# Altium PCB BatteryOperatedNode_V01.PcbDoc
Units mm, origin at the board's own origin, x right, y up, seen from the top; angles counter-clockwise.
Board outline 41.22 x 57.73 mm, 2 copper layers (Top, Bottom), stack 1.57 mm thick; 73 components, 60 nets, 243 pads, 137 vias.
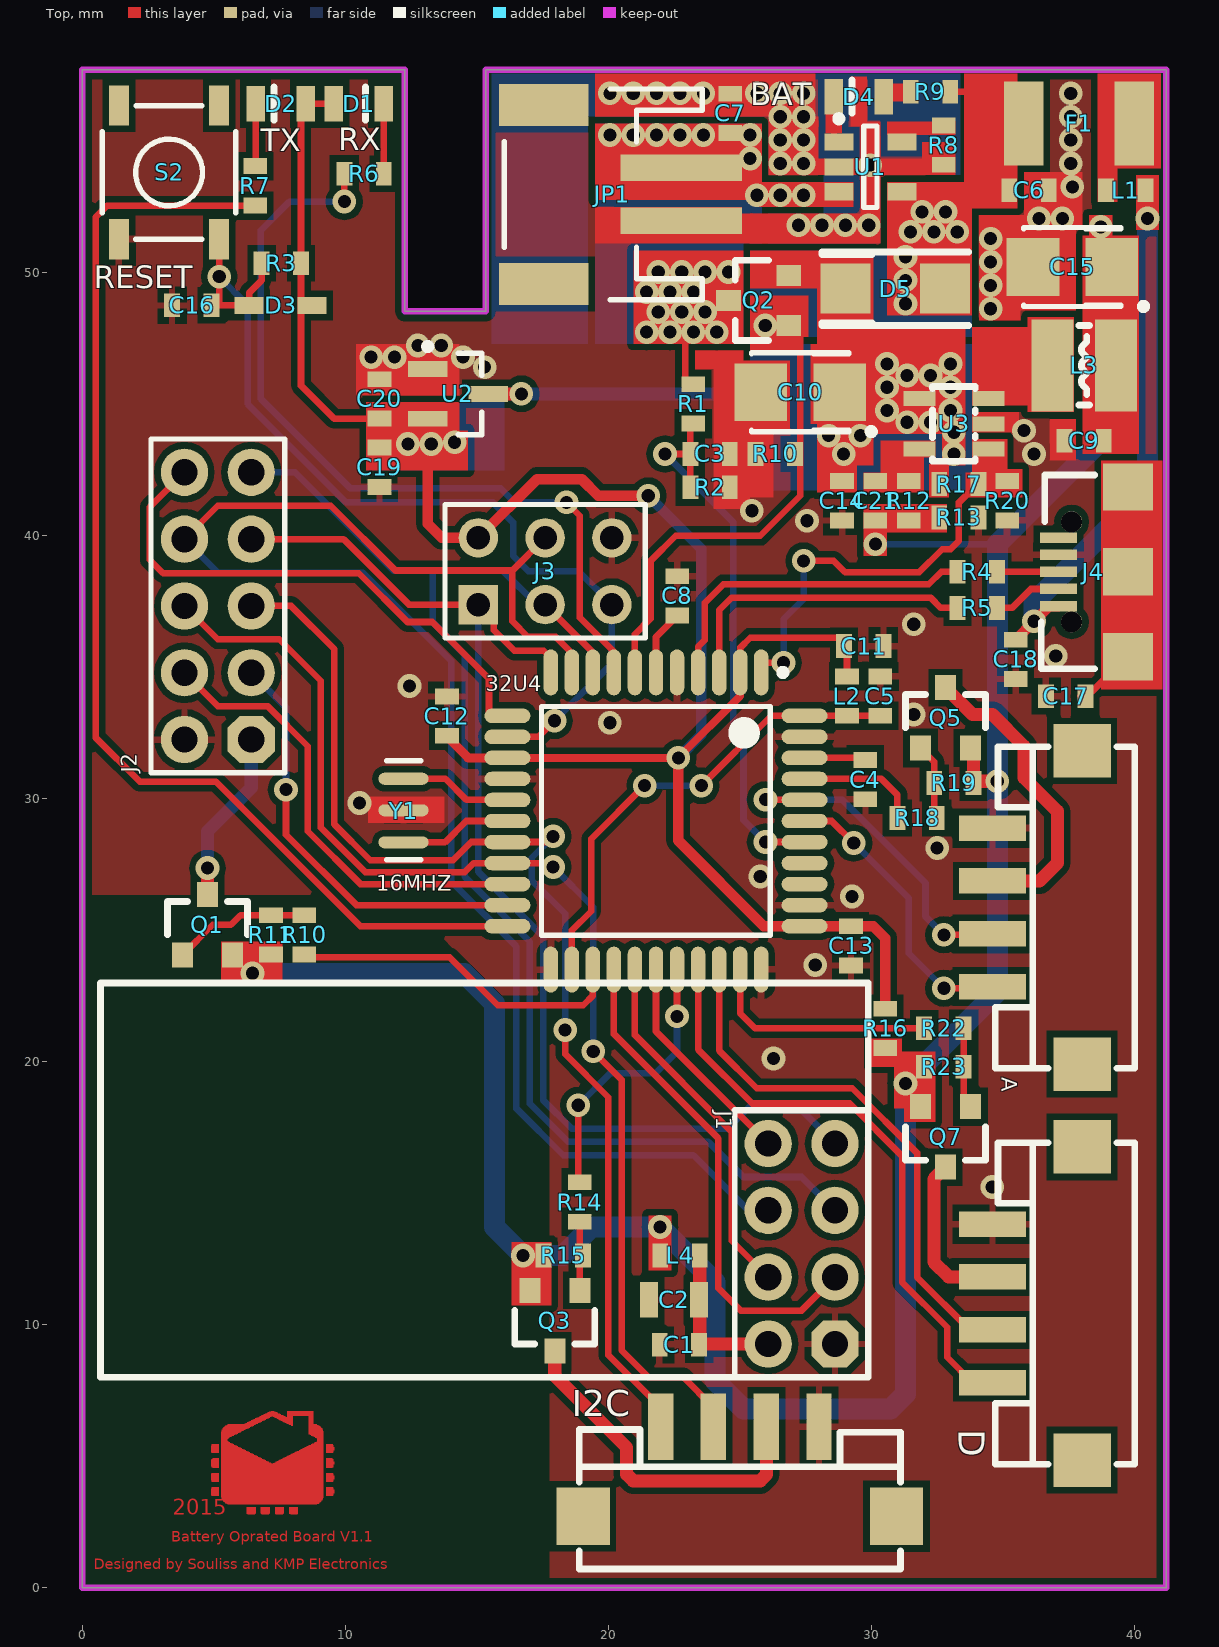
[diagram p0: Top view]
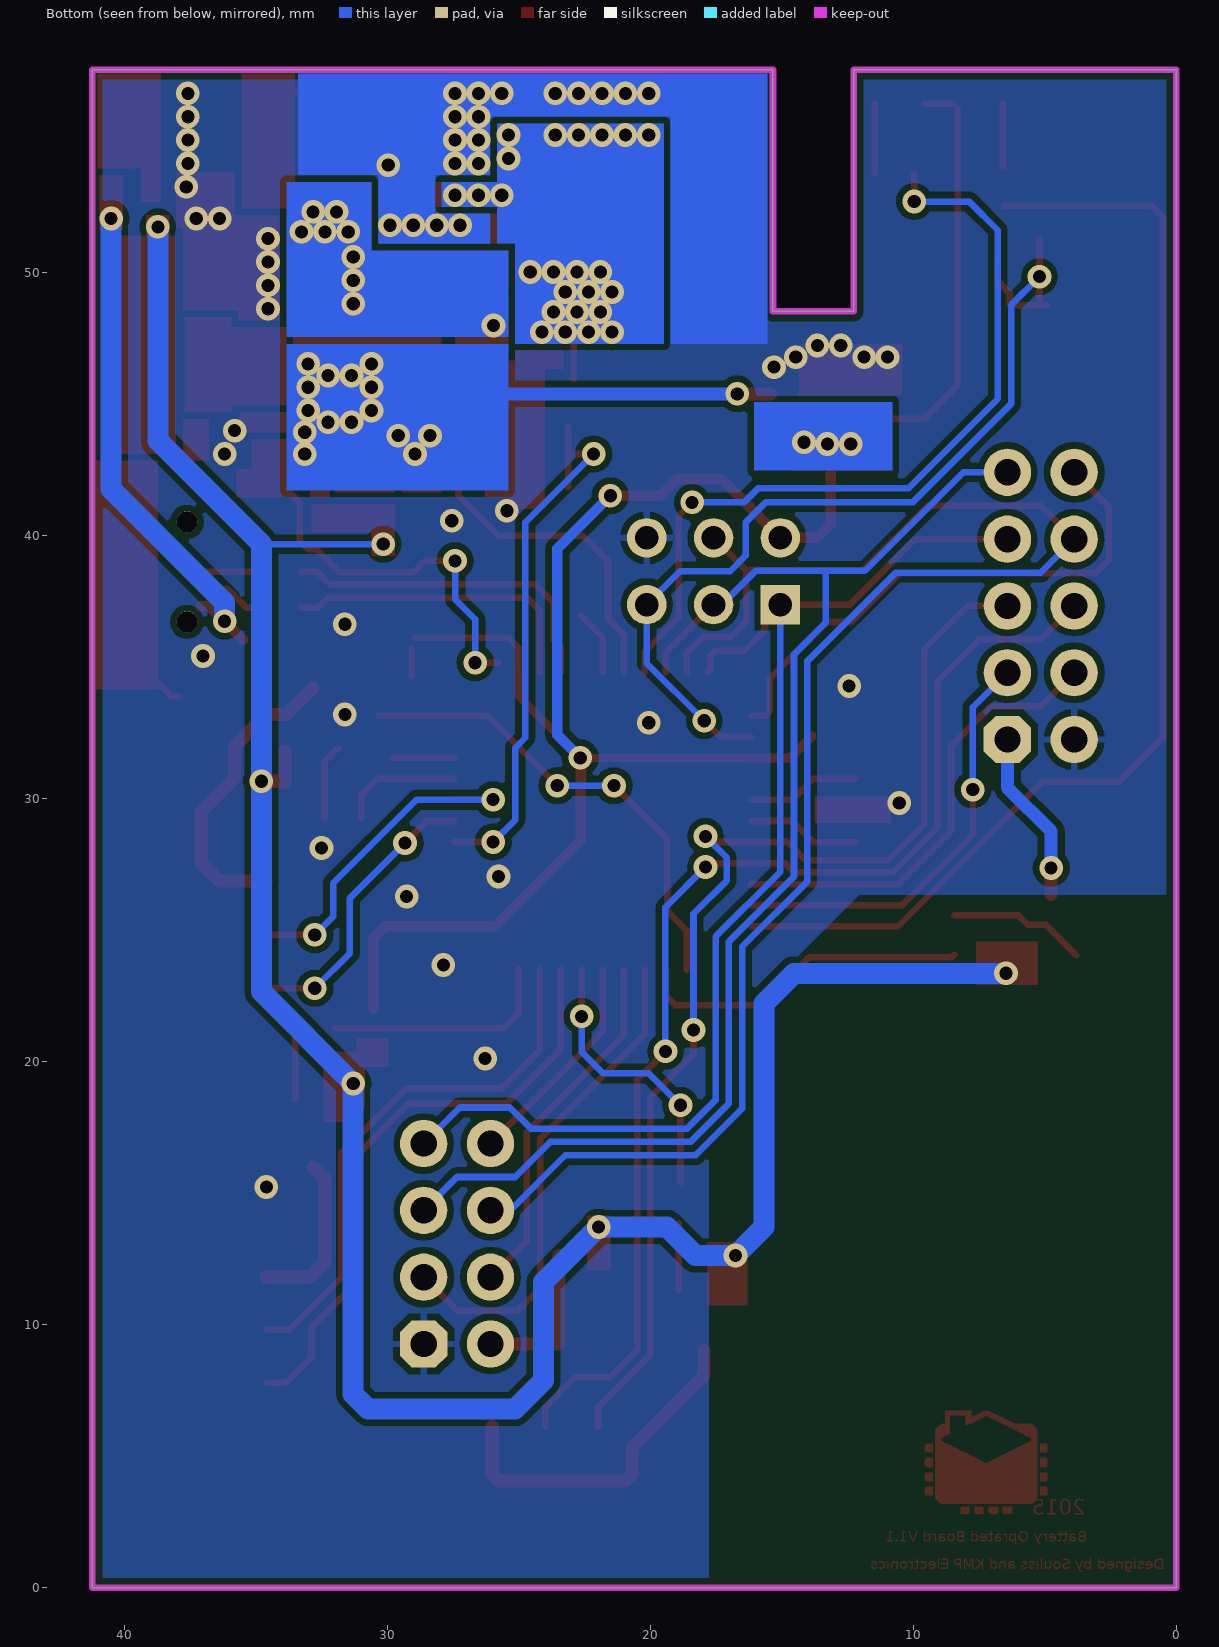
[diagram p1: Bottom view, seen from below]
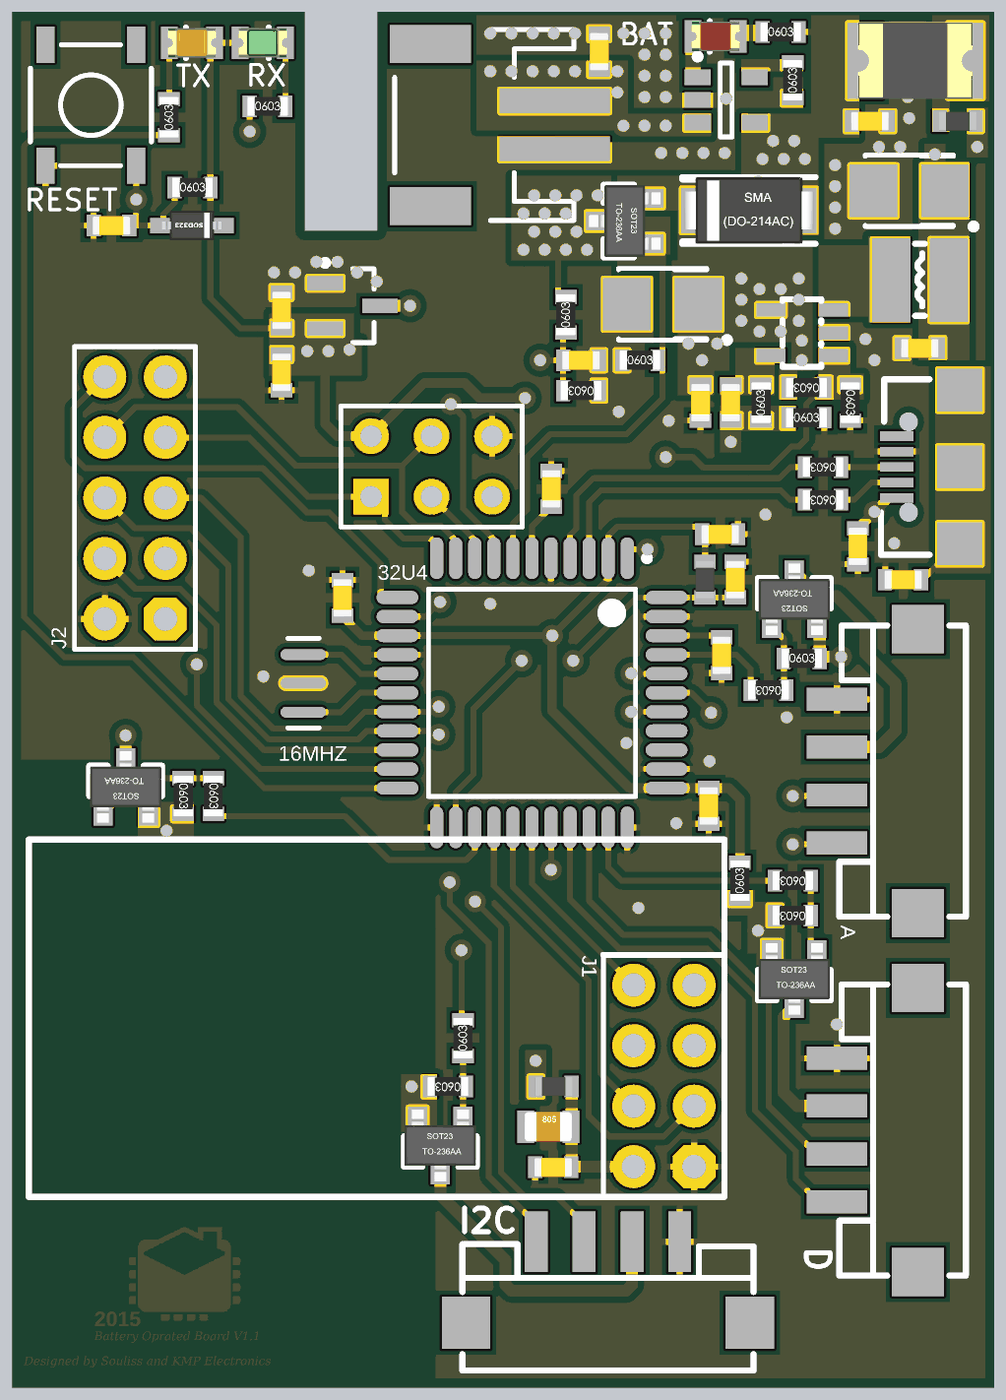
[diagram p2: 3D render of the assembled board from above, using the file's embedded part models]

## Layer stack, top to bottom
Top Solder: solder mask 0.0102, Solder Resist, Dk 3.5
Top: signal copper 0.035
Dielectric 1: core 1.5, FR-4, Dk 4.8
Bottom: signal copper 0.035
Bottom Solder: solder mask 0.0102, Solder Resist, Dk 3.5

## Board outline
0,0 0,57.734 12.268,57.734 12.268,48.539 15.342,48.539 15.342,57.734 41.224,57.734 41.224,0

## Design rules (kind name [scope] priority, off if disabled: settings)
Clearance POLY [InPolygon] p1: gap=0.25
Clearance mdViaVia [IsVia vs IsVia] p2: gap=0.203
Clearance mdPadVia [IsPad vs IsVia] p3: gap=0.203
Clearance mdPadPad [IsPad vs IsPad] p4: gap=0.203
Clearance mdWireVia [(InLayerClass('Signal Layers') AND IsTrack) vs IsVia] p5: gap=0.203
Clearance mdWirePad [(InLayerClass('Signal Layers') AND IsTrack) vs IsPad] p6: gap=0.203
Clearance mdWireWire [(InLayerClass('Signal Layers') AND IsTrack) vs (InLayerClass('Signal Layers') AND IsTrack)] p7: gap=0.203
Clearance [All] p8: gap=0.2
HoleSize [All] p1: absolutevalues=TRUE maxlimit=2540 minlimit=0.381 maxpercent=80.000 minpercent=20.000
HoleToHoleClearance [All] p1: gap=0.203 allowstackedmicrovias=TRUE
PolygonConnect PolygonConnect_1 [InNet(gnd) and isvia] p1: connectstyle=Direct reliefconductorwidth=0.254 reliefentries=4 polygonreliefangle="90 Angle" airgapwidth=0.254
PolygonConnect [All] p2: connectstyle=Relief reliefconductorwidth=0.254 reliefentries=4 polygonreliefangle="90 Angle" airgapwidth=0.254
RoomDefinition BatteryOperatedNode_V01 [InComponentClass('BatteryOperatedNode_V01')] p1: confinementstyle=ConfineIn formatcopy=TRUE lockcomponents=FALSE outline 0,57.734 12.268,57.734 12.268,48.539 15.342,48.539 15.342,57.734 41.224,57.734 41.224,0 0,0
RoutingVias [All] p1: holewidth=0.4 width=0.9 viastyle="Through Hole" minholewidth=0.4 minwidth=0.9 maxholewidth=0.4 maxwidth=0.9
SilkToSilkClearance [All] p1 off: silktosilkclearance=0.254
SilkToSolderMaskClearance [IsPad] p1 off: minsilkscreentomaskgap=0.254 clearancetoexposedcopper=TRUE
SolderMaskExpansion [All] p1: expansion=0.102
Width [All] p1: maxlimit=0.25 minlimit=0.25 preferedwidth=0.25
26 further rules are at their usual default settings.

## Components (designator, comment, footprint, x,y, rotation, side; value= is the part's Value field where it differs from the comment)
32U4 "ATmega32U4-AU" 44ML_N 21.819,29.159 r270 top
A "TWIG-4P-2.0-SMD" 4P-SMD-2.0 34.62,25.883 r270 top
C1 "100nF" C0603 22.708,9.246 r0 top
C2 "10uF" C0805 22.504,10.947 r0 top
C3 "100nF" C0603 23.876,43.116 r180 top
C4 "100nF" C0603 29.781,30.734 r270 top
C5 "10nF" C0603 30.353,33.909 r90 top
C6 "4,7uF" C0603 36.005,53.149 r180 top
C7 "4,7uF" C0603 24.638,56.07 r270 top
C8 "1uF" C0603 22.631,37.719 r90 top
C9 "1uF" C0603 38.1,43.624 r0 top
C10 "TANT B SMD 100uF 6.3V" B 27.305,45.466 r180 top
C11 "100nF" C0603 29.718,35.814 r180 top
C12 "100nF" C0603 13.868,33.147 r270 top
C13 "100nF" C0603 29.235,24.409 r90 top
C14 "1uF" C0603 28.892,41.338 r90 top
C15 "TANT B SMD 100uF 6.3V" B 37.655,50.228 r180 top
C16 "10nF" C0603 4.166,48.768 r0 top
C17 "10nF" C0603 37.401,33.909 r180 top
C18 "10nF" C0603 35.496,35.306 r90 top
C19 "4,7uF" C0603 11.303,42.608 r90 top
C20 "4,7uF" C0603 11.303,45.212 r270 top
C21 "22pF" C0603 30.162,41.338 r270 top
D "TWIG-4P-2.0-SMD" 4P-SMD-2.0 34.62,10.82 r270 top
D1 "GREEN LED" LED0805G 10.516,56.439 r180 top
D2 "ORANGE LED" LED0805OR 7.544,56.439 r0 top
D3 "1N4148WS" SOD323 7.544,48.768 r180 top
D4 "RED LED" LED0805R 29.527,56.706 r0 top
D5 "B340A" DO-214AC(SMA) 30.924,49.403 r0 top
F1 "PFMF.XXX.X" F1812 37.91,55.689 r180 top
I2C "TWIG-4P-2.0-SMD" 4P-SMD-2.0 25.019,6.121 r180 top
J1 "Header 4X2" HDR2X4 28.626,9.271 r90 top
J2 "Header 5X2" HDR2X5 6.426,32.258 r90 top
J3 "Header 3X2" HDR2X3 15.062,37.389 r0 top
J4 "USB B MICRO R/A SMD 1" "USB B MICRO R/A SMD 1" 39.776,38.633 r270 top
JP1 "JST-2" JST-2-SMD 19.075,52.984 r90 top
L1 "BLM18PG121SN1D" L0603 39.688,53.149 r180 top
L2 "BLM18AG601SN1D" L0603 29.083,33.909 r90 top
L3 "SRN4026-2R2Y" CD32 38.1,46.482 r0 top (schematic designator L1)
L4 "BLM18PG121SN1D" L0603 22.733,12.636 r0 top
Q1 "IRLML6401" SOT23 4.763,25.209 r0 top
Q2 "IRLML6401" SOT23 25.717,48.959 r90 top
Q3 "IRLML6401" SOT23 17.97,10.16 r180 top
Q5 "IRLML6401" SOT23 32.829,33.084 r0 top
Q7 "IRLML6401" SOT23 32.829,17.145 r180 top
R1 "1M" R0603 23.241,45.021 r90 top
R2 "470K" R0603 23.876,41.846 r180 top
R3 "10K" R0603 7.569,50.368 r0 top
R4 "22" R0603 34.036,38.633 r180 top
R5 "22" R0603 34.036,37.262 r180 top
R6 "330" R0603 10.719,53.772 r0 top
R7 "330" R0603 6.579,53.315 r90 top
R8 "10K" R0603 32.766,54.864 r90 top
R9 "330" R0603 32.258,56.896 r0 top
R10 "not mounted" R0603 26.352,43.116 r0 top
R10 "10K" R0603 8.445,24.828 r270 top
R11 "100K" R0603 7.175,24.828 r270 top
R12 "4.99K" R0603 31.432,41.338 r90 top
R13 "1.1K" R0603 33.337,40.703 r0 top
R14 "10K" R0603 18.923,14.668 r90 top
R15 "100K" R0603 18.288,12.636 r180 top
R16 "not mounted" R0603 30.543,21.273 r90 top
R17 "not mounted" R0603 33.337,41.974 r180 top
R18 "10K" R0603 31.75,29.273 r180 top
R19 "100K" R0603 33.147,30.607 r0 top
R20 "10K" R0603 35.179,41.338 r270 top
R22 "10K" R0603 32.766,21.273 r180 top
R23 "100K" R0603 32.766,19.812 r180 top
S2 "!RESET" TACTILE_SWITCH_SMD 3.302,53.823 r90 top
U1 "MCP73831T-2ACI/OT" SOT-23-OT5_N 29.972,54.038 r0 top
U2 "MCP1701AT-3302I/CB" SOT-23A-CB3_N 14.287,45.402 r0 top
U3 "SY8009AAAC(SOT23-5)" SOT23-5 33.147,44.259 r0 top (schematic designator U1)
Y1 "16MHZ" RESONATOR-SMD 12.217,29.566 r270 top

## Footprints (in the part's own frame and the unit in brackets; to place one, negate y for a bottom-side part, rotate by r counter-clockwise, add the part's x,y. Pads: shape width x height; smd on the part's side, far side on the other; paste and mask are expansions set on the pad)
4P-SMD-2.0 [mil]
  rect 38x100 smd: 1(-118.11,0) 2(-39.37,0) 3(40,0) 4(119,0)
  rect 80x86 smd: SS1(-234.09,134) SS2(235,134)
  silkscreen extent -240,4 241,213
44ML_N [mm] "Thin QFP, 44-Leads, Body 10x10mm, Pitch 0.8mm, IPC Medium Density"
  oval 1.75x0.55 smd: 1(-5.65,4) 2(-5.65,3.2) 3(-5.65,2.4) 4(-5.65,1.6) 5(-5.65,0.8) 6(-5.65,0) 7(-5.65,-0.8) 8(-5.65,-1.6) 9(-5.65,-2.4) 10(-5.65,-3.2) 11(-5.65,-4) 23(5.65,-4) 24(5.65,-3.2) 25(5.65,-2.4) 26(5.65,-1.6) 27(5.65,-0.8) 28(5.65,0) 29(5.65,0.8) 30(5.65,1.6) 31(5.65,2.4) 32(5.65,3.2) 33(5.65,4)
  oval 0.55x1.75 smd: 12(-4,-5.65) 13(-3.2,-5.65) 14(-2.4,-5.65) 15(-1.6,-5.65) 16(-0.8,-5.65) 17(0,-5.65) 18(0.8,-5.65) 19(1.6,-5.65) 20(2.4,-5.65) 21(3.2,-5.65) 22(4,-5.65) 34(4,5.65) 35(3.2,5.65) 36(2.4,5.65) 37(1.6,5.65) 38(0.8,5.65) 39(0,5.65) 40(-0.8,5.65) 41(-1.6,5.65) 42(-2.4,5.65) 43(-3.2,5.65) 44(-4,5.65)
  silkscreen extent -5.77,-4.35 4.35,4.95, body extent -5,-5 5,5, height 1.2
B [mm] "Capacitor, SM Tantalum; Body 3.5 x 2.8 mm (LxW typ)"
  rect 2x2.2 smd: 1(-1.5,0) 2(1.5,0)
  silkscreen extent -2.83,-1.5 1.85,1.62
C0603 [mm] "SMD Capacitor"
  rect 0.6x0.9 smd: 1(-0.75,0) 2(0.75,0)
  body extent -0.8,-0.4 0.8,0.4, height 0.86
C0805 [mm] "SMD Capacitor"
  rect 0.7x1.35 smd: 1(-0.95,0) 2(0.95,0)
  body extent -1,-0.62 1,0.63, height 0.78
CD32 [mil] "CD32"
  rect 63x138 smd: 1(-47.24,0) 2(48,0)
  silkscreen extent -8,-59 8,60
DO-214AC(SMA) [mm] "Diode"
  rect 1.9x1.9 smd: 1(-1.89,0) 2(1.89,0)
  silkscreen extent -2.79,-1.4 2.79,1.4, body extent -2.75,-1.4 2.75,1.4, height 2.6
F1812 [mm]
  rect 1.5x3.2 smd: 1(-2.1,0) 2(2.1,0)
  body extent -2.41,-1.61 2.41,1.61, height 1.32
HDR2X3 [mm] "Connector; Header; 3x2 Position"
  rect 1.5x1.5 hole 0.9: 1(0,0)
  round 1.5 hole 0.9: 2(0,2.54) 3(2.54,0) 4(2.54,2.54) 5(5.08,0) 6(5.08,2.54)
  silkscreen extent -1.27,-1.27 6.35,3.81
HDR2X4 [mm]
  oct 1.8x1.8 hole 1: 1(0,0)
  round 1.8 hole 1: 2(0,2.54) 3(2.54,0) 4(2.54,2.54) 5(5.08,0) 6(5.08,2.54) 7(7.62,0) 8(7.62,2.54)
  silkscreen extent -1.27,3.81 8.89,3.81
HDR2X5 [mm]
  oct 1.8x1.8 hole 1: 1(0,0)
  round 1.8 hole 1: 2(0,2.54) 3(2.54,0) 4(2.54,2.54) 5(5.08,0) 6(5.08,2.54) 7(7.62,0) 8(7.62,2.54) 9(10.16,0) 10(10.16,2.54)
  silkscreen extent -1.27,-1.27 11.43,3.81
JST-2-SMD [mil] "JST-2-SMD"
  rect 40x182 smd: 1(-39.37,-145.67) 2(40,-145.67)
  rect 63x134 smd: NC1(-133.86,60) NC2(134,60)
  silkscreen extent -157,-177 158,119
L0603 [mm]
  rect 0.6x0.9 smd: 1(-0.75,0) 2(0.75,0)
  body extent -0.8,-0.4 0.8,0.4, height 0.8
LED0805G [mm]
  rect 0.7x1.35 smd: 1(-0.95,0) 2(0.95,0)
  silkscreen extent -0.25,-0.64 -0.25,0.64, body extent -1.01,-0.62 1.01,0.63, height 1.1
LED0805OR [mm]
  rect 0.7x1.35 smd: 1(-0.95,0) 2(0.95,0)
  silkscreen extent -0.25,-0.64 -0.25,0.64, body extent -1.01,-0.62 1.01,0.63, height 1.1
LED0805R [mm]
  rect 0.7x1.35 smd: 1(-0.95,0) 2(0.95,0)
  silkscreen extent -0.25,-0.64 -0.25,0.64, body extent -1.01,-0.62 1.01,0.63, height 1.1
R0603 [mm] "SMD Resistor"
  rect 0.6x0.9 smd: 1(-0.75,0) 2(0.75,0)
  body extent -0.85,-0.4 0.85,0.4, height 0.55
RESONATOR-SMD [mil]
  rrect100% 18x75 smd: 1(-47.24,0) 2(0,0) 3(48,0)
  Top lines w10: 0,-40 0,0 0,40 ; 48,0 48,40 ; -47.24,0 -47.24,40
  silkscreen extent -74,-25 74,26
SOD323 [mm]
  rect 1.1x0.65 smd: 1(-1.2,0) 2(1.2,0)
  body extent -1.25,-0.63 1.25,0.62, height 0.95
SOT23 [mm]
  rect 0.8x0.95 smd: 1(-0.95,-1.15) 2(0.95,-1.15) 3(0,1.15)
  silkscreen extent -1.52,-0.38 1.52,0.89, body extent -1.5,-1.5 1.5,1.5, height 1.3
SOT23-5 [mil] "SOT23-5"
  rect 48x22 smd: 1(52,-37.4) 2(52,0) 3(52,38) 4(-51.18,38) 5(-51.18,-37.4)
  silkscreen extent -32,-56 32,56
SOT-23-OT5_N [mm] "SOT23, 5-Leads, Body 2.9x1.6mm, Pitch 0.95mm, Lead Span 2.7mm, IPC Medium Density"
  rect 1.1x0.65 smd: 1(-1.2,0.95) 2(-1.2,0) 3(-1.2,-0.95) 4(1.2,-0.95) 5(1.2,0.95)
  silkscreen extent -1.32,-1.55 0.25,1.95, body extent -0.9,-1.55 0.9,1.55, height 1.45
SOT-23A-CB3_N [mm] "SOT346, 3-Leads, Body 2.9x1.5mm, Pitch 0.95mm, Lead Span 2.6mm, IPC Medium Density"
  rect 1.5x0.6 smd: 1(-1.15,0.95) 2(-1.15,-0.95) 3(1.15,0)
  silkscreen extent -1.27,-1.55 0.9,1.92, body extent -0.9,-1.55 0.9,1.55, height 1.45
TACTILE_SWITCH_SMD [mil] "TACTILE_SWITCH_SMD"
  rect 60x30 smd: 1(-100,75) 2(100,75) 3(-100,-75) 4(100,-75)
  silkscreen extent -100,-100 100,100
"USB B MICRO R/A SMD 1" [mm]
  rect 0.4x1.4 smd: 1(1.3,-2.65) 2(0.65,-2.65) 3(0,-2.65) 4(-0.65,-2.65) 5(-1.3,-2.65)
  rect 1.8x1.9 smd: 6(-3.225,0) 7(3.225,0) 8(0,0)
  round 0.8 hole 0.8 unplated: 9(-1.9,-2.15) 10(1.9,-2.15)
  silkscreen extent -3.68,-3.3 3.68,-1.27

## Part data
32U4: "8-bit AVR Microcontroller, 44-pin TQFP, Industrial Grade (-40°C to 85°C)"
A D I2C: library part TWIG-4P-2.0-SMD-FEMALE-REINFORCE'DD', "part num:1125S-SMT-4P URL: http://oom.lt/J204S"
C1 C3 C4 C5 C6 C7 C8 C9 C11 C12 C13 C14 C16 C17 C18 C19 C20 C21: library part C0603, "SMD Capacitor"
C2: library part C0805, "SMD Capacitor"
C10 C15: library part CAP_SMT_F6.3, "Electrolytic Capacitor D6,3"
D1: library part LED0805G, "GREEN SMD LED 0805"
D2: library part LED0805OR, "ORANGE SMD LED 0805"
D3: "Fast Switching  Surface Mount  SOD323"
D4: library part LED0805R, "RED SMD LED 0805"
D5: library part GF1A, "General Purpose Rectifiers (Glass Passivated)"
F1: "Resettable Fuse 1812"
J1: "Header, 4-Pin, Dual row"
J2: "Header, 5-Pin, Dual row"
J3: "Header, 3-Pin, Dual row"
JP1: library part M02-JST-2MM-SMT, "Standard 2-pin 0.1\" header. Use with <br> / - straight break away headers ( PRT-00116)<br> / - right angle break away headers (PRT-00553)<br> / - swiss pins (PRT-00743)<br> / - machine pins (PRT-00117)<br> / - female headers (PRT-00115)<br><br> /  /  Molex polarized connector foot print use with: PRT-08233 with associated crimp pins and housings.<br><br> /  / 2.54_SCREWTERM for use with  PRT-10571.<br><br> /  / 3.5mm Screw Terminal footprints for  PRT-08084<br><br> /  / 5mm Screw Terminal footprints for use with PRT-08433"
L1 L2 L4: library part L0603, "EMI Filter Beads"
L3: library part L-CD32
Q1 Q2 Q3 Q5 Q7: library part FDN5618P, "60V P-Channel Logic Level PowerTrench? MOSFET"
R1 R2 R3 R4 R5 R6 R7 R8 R9 R10 R10 R11 R12 R13 R14 R15 R16 R17 R18 R19 R20 R22 R23: library part R0603, "SMD Resistor"
S2: library part SWITCH-MOMENTARY-2SMD, "Various NO switches- part num:TS-1518S"
U1: "Miniature Single-Cell, Fully Integrated Li-Ion, Li-Polymer Charge Management Controller, 4.2V, 5-Pin SOT-23, Industrial Temperature, Tape and Reel"
U2: "2 µA Low-Dropout Positive Voltage Regulator, 3-Pin SOT-23A, Industrial Temperature, Tape and Reel"
U3: library part SY8008
Y1: library part RESONATOR8MHZ, "Resonator ,Small SMD resonator,Used, eg, on the Arduino Pro/ Pro Mini boards.  16MHz- XTAL-08895"

## Via types
v1: diameter 0.9, hole 0.5, Top to Bottom, tented both sides, 137 vias

## Nets (pads, with @x,y where several pads share a name; then routed paths per layer and width w, separated by ;. In a path a pad name is that pad's centre, name@x,y a point inside that pad or via, vN(x,y) a via of type N, cw(c..) or ccw(c..) an arc to the next point about the centre after c; other vN are vias at no path point)
3V3: C9.2 C15.1 C21.2 L3.2 L4.1 Q1.2 Q3.2 Q5.2 Q7.2 R11.2 R12.1 R13.1 R15.2 R16.1 R19.2 R23.2 | length 95.5
  Top w0.25: Q1.2@5.731,24.078 R11.2
  Top w0.5: R19.2 Q5.2@33.897,31.816 ; R19.2@33.961,30.67 v1(34.798,30.67)
  Bottom w0.25: v1(30.162,39.688) 34.734,39.688
  Bottom w0.8: v1(6.477,23.368) 14.541,23.368 15.684,22.225 15.684,13.716 v1(16.764,12.636) 18.288,12.636 19.367,13.716 v1(21.971,13.716) 24.066,11.62 24.066,7.874 25.146,6.794 30.734,6.794 31.305,7.366 v1(31.305,19.177) 34.798,22.669 34.798,39.688 38.735,43.624 v1(38.735,51.752)
3V3MCU: 32U4.2 32U4.14 32U4.34 C11.2 C12.2 C13.2 C19.2 C20.2 D1.2 D2.2 D3.1 J3.2 L2.2 R3.2 R16.2 U2.2 | length 77.7
  Top w0.25: D2.2@8.319,56.264 R3.2 8.319,45.719 9.577,44.462 C20.2 ; D2.2 D1.2 ; 32U4.2@25.031,34.822 25.031,35.762 25.4,36.131 C11.2@28.956,36.131 ; L2.2 C11.2@29.083,35.699
  Top w0.3: 32U4.14 v1(22.669,31.559) 25.019,33.909 32U4.2
  Top w0.35: C12.2@13.856,32.385 14.682,31.559 32U4.14
  Top w0.4: C19.2 C20.2 ; C20.2@11.312,44.453 U2.2 13.137,40.457 13.665,39.929 J3.2 17.297,42.164 18.986,42.164 19.621,41.529 v1(21.526,41.529) ; v1@22.657,31.547 22.657,28.423 25.92,25.159 32U4.34 C13.2 ; C13.2 30.086,25.159 30.543,24.701 R16.2
  Bottom w0.4: v1(21.526,41.529) 23.546,39.51 23.546,32.436 v1@22.657,31.547
  other v1: 12.383,43.497 13.271,43.497 14.16,43.561
3V3NRF: C1.2 C2.2 J1.2 L4.2 | length 6
  Top w0.5: L4.2 23.483,9.271 J1.2
A0: 32U4.36
A1: 32U4.37
A2/BAT: 32U4.38 C3.2 R1.1 R2.2 | length 21.1
  Top w0.25: v1(22.162,43.116) C3.2 ; R2.2 C3.2 ; R1.1@23.126,44.156 C3.2 ; v1(25.984,28.359) 32U4.38
  Bottom w0.25: v1(22.162,43.116) 24.765,40.513 24.765,32.322 25.146,31.941 25.146,29.197 v1(25.984,28.359)
A3: 32U4.39 A.4 | length 11
  Top w0.25: 32U4.39 28.499,29.159 v1(29.337,28.321) ; v1(32.766,22.796) 34.557,22.796 A.4
  Bottom w0.25: v1(29.337,28.321) 31.432,26.226 31.432,24.13 v1(32.766,22.796)
A4: 32U4.40 A.3 | length 13.1
  Top w0.25: v1@25.997,29.959 32U4.40 ; v1(32.766,24.828) 34.455,24.828 34.519,24.765 A.3@34.646,24.892
  Bottom w0.25: v1(25.984,29.972) 28.892,29.972 32.067,26.797 32.067,25.527 v1(32.766,24.828)
A5: 32U4.41 R18.2 | length 4.7
  Top w0.25: 32U4.41 30.391,30.759 31,30.151 R18.2
D0/RX: 32U4.20 J2.4 | length 17.5
  Top w0.25: J2.4 5.156,33.528 7.048,33.528 8.572,32.004 8.572,28.765 10.579,26.759 32U4.20
D1/TX: 32U4.21 J2.3 | length 16.2
  Top w0.25: v1(7.747,30.353) 7.747,28.639 10.426,25.959 32U4.21
  Bottom w0.25: J2.3 7.747,33.477 v1(7.747,30.353)
D2/SDA: 32U4.19 I2C.3 J2.6 | length 46.1
  Top w0.25: J2.6 5.156,36.068 7.493,36.068 9.072,34.489 9.072,28.907 10.767,27.212 14.538,27.212 14.885,27.559 32U4.19 v1@17.754,27.559 ; v1(19.431,20.396) 20.511,19.317 20.511,9.03 21.539,8.001 22.86,8.001 24.003,6.858 I2C.3
  Bottom w0.25: v1(17.907,27.407) 19.431,25.883 v1(19.431,20.396)
D3/SCL: 32U4.18 I2C.4 J2.5 | length 44.6
  Top w0.25: J2.5 7.938,37.338 9.588,35.687 9.588,29.031 10.954,27.666 14.102,27.666 14.796,28.359 32U4.18 17.691,28.359 v1(17.907,28.575) ; v1(18.364,21.209) 18.364,20.295 20.002,18.656 20.002,8.852 21.996,6.858 I2C.4
  Bottom w0.25: v1(17.907,28.575) 17.094,27.762 17.094,26.899 18.364,25.629 v1(18.364,21.209)
D4/UE_PW_EN: 32U4.25 R10.2@8.445,24.078 | length 12.9
  Top w0.25: R10.2@8.445,24.078 8.546,23.978 13.97,23.978 15.799,22.149 19.05,22.149 19.419,22.517 32U4.25
D5: 32U4.31 D.3 | length 20.6
  Top w0.25: 32U4.31 24.219,20.435 25.654,18.999 29.286,18.999 31.75,16.535 31.75,11.811 33.757,9.804 D.3
D6/NRF_CS: 32U4.27 J1.4 | length 13.8
  Top w0.25: 32U4.27 21.019,21.018 24.701,17.335 24.701,13.195 J1.4
D7/PW_EN: 32U4.1 R17.1 R20.1 U3.1 | length 13.7
  Top w0.25: 32U4.1@25.781,35.179 v1(26.67,35.179) ; v1(27.432,39.052) 28.575,39.052 29.011,38.617 31.822,38.617 32.703,39.497 33.02,39.497 33.337,39.814 33.337,41.275 33.718,41.656
  Bottom w0.25: v1(26.67,35.179) 26.67,36.83 27.432,37.592 v1(27.432,39.052)
D8/NRF_IRQ: 32U4.28 J1.8 | length 8.4
  Top w0.25: 32U4.28 21.819,21.158 J1.8
D9: 32U4.29 R14.2 | length 10.7
  Top w0.25: R14.2@18.86,15.419 v1(18.86,18.351) ; v1(22.619,21.73) 32U4.29
  Bottom w0.25: v1(18.86,18.351) 20.066,19.558 21.793,19.558 22.619,20.383 v1(22.619,21.73)
D10: 32U4.30 D.4 | length 23
  Top w0.25: 32U4.30 23.419,20.473 25.476,18.415 29.185,18.415 31.178,16.421 31.178,11.62 32.893,9.906 32.893,8.763 33.858,7.798 D.4
D11/UE_SS: 32U4.12 J2.10 | length 20.7
  Top w0.25: J2.10 2.565,41.097 2.565,39.091 3.073,38.583 10.516,38.583 12.37,36.728 13.31,36.728 15.469,34.569 15.469,33.325 15.634,33.159 32U4.12
D12/NRF_CE: 32U4.26 J1.3 | length 19.1
  Top w0.25: 32U4.26 20.219,21.056 24.194,17.081 24.194,11.392 25.044,10.541 27.356,10.541 J1.3
D13: 32U4.32 R22.2 | length 8.9
  Top w0.25: 32U4.32 25.019,21.844 25.59,21.273 R22.2
D15/SCK: 32U4.9 J1.5 J2.9 J3.3 | length 51.7
  Top w0.25: J3.3 19.419,35.572 32U4.9
  Bottom w0.25: J2.9 8.103,42.418 11.849,38.672 16.002,38.672 17.285,37.389 J3.3 ; 13.335,38.672 13.335,36.703 14.541,35.496 14.541,27.051 17.018,24.575 17.018,18.415 18.479,16.954 23.812,16.954 25.146,15.621 27.356,15.621 J1.5
D16/MOSI: 32U4.10 J1.6 J2.8 J3.4 | length 62.5
  Top w0.25: J2.8 5.156,41.148 9.449,41.148 11.913,38.684 16.358,38.684 ; J3.4 16.358,38.684 ; 32U4.10 18.619,35.547 17.996,36.17 16.942,36.17 16.358,36.754 16.358,38.684
  Bottom w0.25: J2.8 5.156,38.608 10.668,38.608 14.034,35.242 14.034,26.86 16.51,24.384 16.51,18.224 18.288,16.447 23.241,16.447 25.336,14.351 J1.6
D17/MISO: 32U4.11 J1.7 J2.7 J3.1 | length 45.5
  Top w0.25: J2.7 9.931,39.878 12.421,37.389 J3.1 ; J3.1@15.646,36.805 15.646,36.424 16.434,35.636 17.551,35.636 17.729,35.458 17.729,34.899 32U4.11
  Bottom w0.25: J3.1 15.067,37.384 15.067,27.224 17.526,24.765 17.526,18.548 18.611,17.462 24.549,17.462 25.349,18.263 27.254,18.263 J1.7
D+: 32U4.4 R4.2 | length 12.9
  Top w0.25: 32U4.4 23.419,35.788 23.673,36.043 23.673,37.452 24.384,38.163 32.194,38.163 32.664,38.633 R4.2
D-: 32U4.3 R5.2 | length 11.8
  Top w0.25: 32U4.3 24.219,37.173 24.701,37.655 32.258,37.655 32.652,37.262 R5.2
GND: 32U4.5 32U4.15 32U4.23 32U4.33 32U4.35 32U4.43 A.1 C1.1 C2.1 C3.1 C4.2 C5.2 C6.1 C7.1 C8.2 C9.1 C10.2 C11.1 C12.1 C13.1 C14.1 C15.2 C16.1 C17.2 C18.1 C19.1 C20.1 D.1 I2C.1 J1.1 J2.2 J3.6 J4.4 JP1.1 R2.1 R8.1 R10.1@25.602,43.116 R13.2 R20.2 S2.1 U1.2 U2.1 U3.2 Y1.2
  other v1: 34.608,15.24 26.289,20.13 27.877,23.685 29.273,26.289 25.781,27.051 32.512,28.13 10.541,29.845 20.066,32.893 31.623,33.21 12.446,34.29 37.02,35.433 31.623,36.639 27.559,40.576 25.463,40.957 36.195,43.116 35.814,44.005 15.303,46.419 10.986,46.799 11.874,46.799 14.478,46.799 12.763,47.244 13.652,47.244 34.544,48.641 34.544,49.53 34.544,50.419 34.544,51.308 27.241,51.816 28.13,51.816 29.019,51.816 29.909,51.816 36.386,52.07 37.274,52.07 37.655,53.276 29.972,54.102 26.543,54.165 27.432,54.165 37.592,54.165 26.543,55.054 27.432,55.054 37.592,55.054 26.543,55.944 27.432,55.944 37.592,55.944 20.066,56.832 20.955,56.832 21.844,56.832 22.733,56.832 23.622,56.832 25.654,56.832 26.543,56.832 27.432,56.832 37.592,56.832
Net32U4_6: 32U4.6 C8.1 | length 2.5
  Top w0.25: 32U4.6 21.819,36.156 C8.1
Net32U4_16: 32U4.16 Y1.1 | length 3.3
  Top w0.25: 13.233,30.766 13.811,30.766 14.618,29.959 32U4.16
Net32U4_17: 32U4.17 Y1.3 | length 3.3
  Top w0.25: 13.233,28.346 13.792,28.346 14.605,29.159 32U4.17
Net32U4_24: 32U4.24 32U4.44 C5.1 L2.1 | length 18.2
  Top w0.25: 32U4.24 18.619,24.994 19.355,25.73 19.355,28.473 v1(21.387,30.505) ; v1(23.546,30.505) 26.2,33.159 32U4.44 C5.1
  Bottom w0.25: v1(21.387,30.505) v1(23.546,30.505)
Net32U4_42: 32U4.42 C4.1 | length 2.3
  Top w0.25: 32U4.42 C4.1@29.781,31.559
NetA_2: A.2 Q5.3 | length 11.6
  Top w0.5: Q5.3 33.853,33.21 34.608,33.21 35.814,32.004 35.814,30.797 37.084,29.527 37.084,27.559 36.408,26.883 A.2
NetC10_1: C10.1 C14.2 D5.1 Q2.2 R17.2 U2.3 U3.4 | length 13.6
  Top w0.5: U2.3 v1(16.7,45.402)
  Bottom w0.5: v1(16.7,45.402) 26.797,45.402 v1(28.384,43.815)
  other v1: 28.956,43.116 33.147,43.116 29.591,43.815 33.147,43.942 31.369,44.323 32.258,44.323 30.607,44.767 33.02,44.767 30.607,45.657 33.02,45.657 31.369,46.101 32.258,46.101 30.607,46.545 33.02,46.545
NetC17_1: C17.1 J4.6 J4.7 J4.8 | length 2.4
  Top w0.25: C17.1@37.961,33.909 38.227,33.909 39.726,35.408 J4.7
NetC18_2: C18.2 J4.1 L1.1 | length 19.3
  Top w0.4: C18.2 v1(36.195,36.755) 36.774,37.333 J4.1
  Bottom w0.8: v1(36.195,36.755) 36.195,37.465 40.513,41.783 v1(40.513,52.07)
NetC21_1: C21.1 R12.2 U3.5
NetD1_1: D1.1 R6.2 | length 2.7
  Top w0.25: R6.2@11.466,53.775 D1.1
NetD2_1: D2.1 R7.2 | length 2.4
  Top w0.25: R7.2@6.594,54.065 D2.1
NetD4_1: D4.1 U1.1 | length 1.5
  Top w0.25: U1.1@28.577,55.183 D4.1
NetD4_2: D4.2 R9.1 | length 0.8
  Top w0.25: D4.2@30.668,56.896 R9.1
NetD_2: D.2 Q7.3 | length 6.3
  Top w0.5: Q7.3 32.385,15.55 32.385,12.383 32.947,11.82 D.2
NetF1_1: F1.1 L1.2
NetI2C_2: I2C.2 Q3.3 | length 13.2
  Top w0.5: Q3.3 17.97,8.064 20.701,5.334 20.701,4.318 20.955,4.064 25.781,4.064 26.019,4.302 I2C.2
NetJ4_2: J4.2 R5.1 | length 2.6
  Top w0.25: R5.1 35.357,37.262 36.078,37.983 J4.2
NetJ4_3: J4.3 R4.1 | length 2.3
  Top w0.25: R4.1 J4.3
NetL3_1: L3.1 U3.3
NetQ1_1: Q1.1 R10.1@8.445,25.579 R11.1 | length 5.3
  Top w0.25: Q1.1 4.962,25.209 5.651,25.209 6.021,25.579 R11.1 R10.1@8.445,25.579
NetQ3_1: Q3.1 R14.1 R15.1 | length 2.5
  Top w0.25: Q3.1 R14.1@18.921,13.857
NetQ5_1: Q5.1 R18.1 R19.1 | length 2.9
  Top w0.25: Q5.1 32.397,31.416 R19.1 R18.1@32.397,29.273
NetQ7_1: Q7.1 R22.1 R23.1 | length 2.7
  Top w0.25: Q7.1@33.516,18.558 R23.1 R22.1
NetR8_2: R8.2 U1.5
RESET: 32U4.13 C16.2 D3.2 J3.5 R3.1 S2.3 | length 36.1
  Top w0.25: C16.2 D3.2 6.344,49.244 6.819,49.72 R3.1 ; C16.2@5.207,48.793 v1(5.207,49.86) S2.3 ; 32U4.13 17.348,32.359 v1(17.958,32.969)
  Bottom w0.25: v1(5.207,49.86) 6.286,48.781 6.286,45.021 10.033,41.275 15.621,41.275 16.383,40.513 16.383,39.243 16.967,38.659 18.872,38.659 J3.5 20.142,35.154 v1(17.958,32.969)
RX_LED: 32U4.8 R6.1 | length 31.6
  Top w0.25: v1(9.969,52.717) R6.1 ; v1(18.415,41.275) 18.923,40.767 18.923,36.893 20.219,35.598 32U4.8
  Bottom w0.25: v1(9.969,52.717) 7.886,52.717 6.794,51.625 6.794,45.212 10.198,41.808 15.913,41.808 16.447,41.275 v1(18.415,41.275)
TX_LED: 32U4.22 R7.1 | length 44.7
  Top w0.25: R7.1 0.952,52.565 0.508,52.121 0.508,32.334 2.184,30.658 5.08,30.658 10.579,25.159 32U4.22
UE_VCC: J2.1 Q1.3 | length 6.6
  Top w0.5: Q1.3 v1(4.763,27.368)
  Bottom w0.5: v1(4.763,27.368) 4.763,28.765 6.426,30.429 J2.1
V_BATT: C7.2 JP1.2 Q2.3 R1.2 U1.3 | length 1.4
  Top w0.25: R1.2@22.924,45.974 22.924,47.371
  other v1: 21.463,47.752 22.352,47.752 23.241,47.752 24.13,47.752 21.907,48.514 22.796,48.514 23.685,48.514 21.463,49.276 22.352,49.276 23.241,49.276 21.907,50.038 22.796,50.038 23.685,50.038 24.575,50.038 25.654,52.959 26.543,52.959 27.432,52.959 25.4,54.356 20.066,55.245 20.955,55.245 21.844,55.245 22.733,55.245 23.622,55.245 25.4,55.245
VUSB: 32U4.7 C6.2 D5.2 F1.2 Q2.1 R9.2 R10.2@27.103,43.116 U1.4 | length 22.4
  Top w0.25: 32U4.7 21.019,36.259 21.615,36.855 21.615,39.048 22.572,40.005 25.781,40.005 27.305,41.529 27.305,47.752 Q2.1@27.241,47.816 ; Q2.1@26.868,47.999 Q2.1 ; R9.2 33.655,56.896 33.655,53.276 33.084,53.276
  other v1: 25.971,48.006 31.305,48.831 31.305,49.721 31.305,50.609 31.496,51.562 32.385,51.562 33.274,51.562 31.941,52.324 32.829,52.324
pads on no net: A.SS1 A.SS2 D.SS1 D.SS2 I2C.SS1 I2C.SS2 J4.5 J4.9 J4.10 JP1.NC1 JP1.NC2 S2.2 S2.4
copper on no net: | length 402.6
  Top w0.025: 4.902,3.543 5.182,3.543 ; 4.902,3.569 5.182,3.569 ; 4.902,3.594 5.182,3.594 ; 4.902,3.619 5.182,3.619 ; 4.902,3.645 5.182,3.645 ; 4.902,3.67 5.182,3.67 ; 4.902,3.696 5.182,3.696 ; 4.902,3.721 5.182,3.721 ; 4.902,3.746 5.182,3.746 ; 4.902,3.772 5.182,3.772 ; 4.902,4.102 5.182,4.102 ; 4.902,4.127 5.182,4.127 ; 4.902,4.153 5.182,4.153 ; 4.902,4.178 5.182,4.178 ; 4.902,4.204 5.182,4.204 ; 4.902,4.229 5.182,4.229 ; 4.902,4.255 5.182,4.255 ; 4.902,4.28 5.182,4.28 ; 4.902,4.305 5.182,4.305 ; 4.902,4.331 5.182,4.331 ; 4.902,4.635 5.182,4.635 ; 4.902,4.661 5.182,4.661 ; 4.902,4.686 5.182,4.686 ; 4.902,4.712 5.182,4.712 ; 4.902,4.737 5.182,4.737 ; 4.902,4.763 5.182,4.763 ; 4.902,4.788 5.182,4.788 ; 4.902,4.813 5.182,4.813 ; 4.902,4.839 5.182,4.839 ; 4.902,4.864 5.182,4.864 ; 4.902,5.169 5.182,5.169 ; 4.902,5.194 5.182,5.194 ; 4.902,5.22 5.182,5.22 ; 4.902,5.245 5.182,5.245 ; 4.902,5.271 5.182,5.271 ; 4.902,5.296 5.182,5.296 ; 4.902,5.321 5.182,5.321 ; 4.902,5.347 5.182,5.347 ; 4.902,5.372 5.182,5.372 ; 4.902,5.397 5.182,5.397 ; 4.928,3.518 5.182,3.518 ; 4.928,3.797 5.182,3.797 ; 4.928,3.823 5.182,3.823 ; 4.928,4.051 5.182,4.051 ; 4.928,4.077 5.182,4.077 ; 4.928,4.356 5.182,4.356 ; 4.928,4.61 5.182,4.61 ; 4.928,4.889 5.182,4.889 ; 4.928,5.143 5.182,5.143 ; 4.928,5.423 5.182,5.423 ; 4.928,5.448 5.182,5.448 ; 4.953,4.585 5.182,4.585 ; 4.953,4.915 5.182,4.915 ; 5.283,3.467 9.169,3.467 ; 5.283,3.492 9.169,3.492 ; 5.283,3.518 9.169,3.518 ; 5.283,3.543 9.169,3.543 ; 5.283,3.569 9.169,3.569 ; 5.283,3.594 9.169,3.594 ; 5.283,3.619 9.169,3.619 ; 5.283,3.645 9.169,3.645 ; 5.283,3.67 9.169,3.67 ; 5.283,3.696 9.169,3.696 ; 5.283,3.721 9.169,3.721 ; 5.283,3.746 9.169,3.746 ; 5.283,3.772 9.169,3.772 ; 5.283,3.797 9.169,3.797 ; 5.283,3.823 9.169,3.823 ; 5.283,3.848 9.169,3.848 ; 5.283,3.873 9.169,3.873 ; 5.283,3.899 9.169,3.899 ; 5.283,3.924 9.169,3.924 ; 5.283,3.95 9.169,3.95 ; 5.283,3.975 9.169,3.975 ; 5.283,4 9.169,4 ; 5.283,4.026 9.169,4.026 ; 5.283,4.051 9.169,4.051 ; 5.283,4.077 9.169,4.077 ; 5.283,4.102 9.169,4.102 ; 5.283,4.127 9.169,4.127 ; 5.283,4.153 9.169,4.153 ; 5.283,4.178 9.169,4.178 ; 5.283,4.204 9.169,4.204 ; 5.283,4.229 9.169,4.229 ; 5.283,4.255 9.169,4.255 ; 5.283,4.28 9.169,4.28 ; 5.283,4.305 9.169,4.305 ; 5.283,4.331 9.169,4.331 ; 5.283,4.356 9.169,4.356 ; 5.283,4.381 9.169,4.381 ; 5.283,4.407 9.169,4.407 ; 5.283,4.432 9.169,4.432 ; 5.283,4.458 9.169,4.458 ; 5.283,4.483 9.169,4.483 ; 5.283,4.508 9.169,4.508 ; 5.283,4.534 9.169,4.534 ; 5.283,4.559 9.169,4.559 ; 5.283,4.585 9.169,4.585 ; 5.283,4.61 9.169,4.61 ; 5.283,4.635 9.169,4.635 ; 5.283,4.661 9.169,4.661 ; 5.283,4.686 9.169,4.686 ; 5.283,4.712 9.169,4.712 ; 5.283,4.737 7.188,4.737 ; 5.283,4.763 7.163,4.763 ; 5.283,4.788 7.087,4.788 ; 5.283,4.813 7.036,4.813 ; 5.283,4.839 6.985,4.839 ; 5.283,4.864 6.934,4.864 ; 5.283,4.889 6.883,4.889 ; 5.283,4.915 6.833,4.915 ; 5.283,4.94 6.782,4.94 ; 5.283,4.966 6.731,4.966 ; 5.283,4.991 6.68,4.991 ; 5.283,5.016 6.629,5.016 ; 5.283,5.042 6.579,5.042 ; 5.283,5.067 6.528,5.067 ; 5.283,5.093 6.477,5.093 ; 5.283,5.118 6.426,5.118 ; 5.283,5.143 6.375,5.143 ; 5.283,5.169 6.325,5.169 ; 5.283,5.194 6.274,5.194 ; 5.283,5.22 6.223,5.22 ; 5.283,5.245 6.172,5.245 ; 5.283,5.271 6.121,5.271 ; 5.283,5.296 6.071,5.296 ; 5.283,5.321 6.02,5.321 ; 5.283,5.347 5.969,5.347 ; 5.283,5.372 5.918,5.372 ; 5.283,5.397 5.867,5.397 ; 5.283,5.423 5.817,5.423 ; 5.283,5.448 5.766,5.448 ; 5.283,5.474 5.715,5.474 ; 5.283,5.499 5.664,5.499 ; 5.283,5.524 5.613,5.524 ; 5.283,5.55 5.563,5.55 ; 5.283,5.575 5.537,5.575 ; 5.283,5.601 5.512,5.601 ; 5.283,5.626 5.512,5.626 ; 5.283,5.651 5.512,5.651 ; 5.283,5.677 5.537,5.677 ; 5.283,5.702 5.563,5.702 ; 5.283,5.728 5.588,5.728 ; 5.283,5.753 5.664,5.753 ; 5.283,5.779 5.69,5.779 ; 5.283,5.804 5.766,5.804 ; 5.283,5.829 5.791,5.829 ; 5.283,5.855 5.867,5.855 ; 5.283,5.88 5.918,5.88 ; 5.283,5.905 5.969,5.905 ; 5.283,5.931 6.02,5.931 ; 5.309,3.391 9.144,3.391 ; 5.309,3.416 9.144,3.416 ; 5.309,3.442 9.169,3.442 ; 5.309,5.956 6.045,5.956 ; 5.309,5.982 6.121,5.982 ; 5.309,6.007 6.147,6.007 ; 5.334,3.34 9.119,3.34 ; 5.334,3.365 9.119,3.365 ; 5.334,6.032 6.198,6.032 ; 5.334,6.058 6.274,6.058 ; 5.359,3.315 9.093,3.315 ; 5.359,6.083 6.325,6.083 ; 5.385,3.289 9.068,3.289 ; 5.385,6.109 6.375,6.109 ; 5.41,3.264 9.042,3.264 ; 5.41,6.134 6.401,6.134 ; 5.436,3.238 9.017,3.238 ; 5.436,6.159 6.477,6.159 ; 5.486,3.213 8.992,3.213 ; 5.486,6.185 6.528,6.185 ; 5.537,3.188 8.915,3.188 ; 5.537,6.21 6.579,6.21 ; 6.172,6.236 6.604,6.236 ; 6.223,6.261 6.68,6.261 ; 6.248,2.832 6.579,2.832 ; 6.248,2.857 6.604,2.857 ; 6.248,2.883 6.604,2.883 ; 6.248,2.908 6.604,2.908 ; 6.248,2.934 6.604,2.934 ; 6.248,2.959 6.604,2.959 ; 6.248,2.984 6.604,2.984 ; 6.248,3.01 6.604,3.01 ; 6.248,3.035 6.604,3.035 ; 6.248,3.061 6.604,3.061 ; 6.274,6.286 6.731,6.286 ; 6.299,2.807 6.553,2.807 ; 6.325,6.312 6.782,6.312 ; 6.375,6.337 6.833,6.337 ; 6.426,6.363 6.883,6.363 ; 6.477,6.388 6.934,6.388 ; 6.528,6.413 6.985,6.413 ; 6.579,6.439 7.036,6.439 ; 6.629,6.464 7.087,6.464 ; 6.706,6.49 7.137,6.49 ; 6.756,6.515 7.188,6.515 ; 6.782,2.857 7.137,2.857 ; 6.782,2.883 7.137,2.883 ; 6.782,2.908 7.137,2.908 ; 6.782,2.934 7.137,2.934 ; 6.782,2.959 7.137,2.959 ; 6.782,2.984 7.137,2.984 ; 6.782,3.01 7.137,3.01 ; 6.782,3.035 7.137,3.035 ; 6.782,3.061 7.137,3.061 ; 6.807,2.832 7.112,2.832 ; 6.807,6.54 7.671,6.54 ; 6.833,2.807 7.087,2.807 ; 6.833,6.566 7.62,6.566 ; 6.909,6.591 7.544,6.591 ; 6.96,6.617 7.518,6.617 ; 7.01,6.642 7.442,6.642 ; 7.061,6.667 7.417,6.667 ; 7.112,6.693 7.341,6.693 ; 7.188,6.718 7.29,6.718 ; 7.264,4.737 9.169,4.737 ; 7.264,6.515 7.722,6.515 ; 7.315,4.763 9.169,4.763 ; 7.315,6.49 7.772,6.49 ; 7.341,2.832 7.645,2.832 ; 7.341,2.857 7.671,2.857 ; 7.341,2.883 7.671,2.883 ; 7.341,2.908 7.671,2.908 ; 7.341,2.934 7.671,2.934 ; 7.341,2.959 7.671,2.959 ; 7.341,2.984 7.671,2.984 ; 7.341,3.01 7.671,3.01 ; 7.341,3.035 7.671,3.035 ; 7.341,3.061 7.671,3.061 ; 7.366,2.807 7.62,2.807 ; 7.366,4.788 9.169,4.788 ; 7.391,6.464 8.001,6.464 ; 7.417,4.813 9.169,4.813 ; 7.417,6.439 8.001,6.439 ; 7.468,4.839 9.169,4.839 ; 7.468,6.413 8.001,6.413 ; 7.518,4.864 9.169,4.864 ; 7.518,6.388 8.001,6.388 ; 7.569,4.889 9.169,4.889 ; 7.569,6.363 8.001,6.363 ; 7.62,4.915 9.169,4.915 ; 7.62,6.337 8.001,6.337 ; 7.671,4.94 9.169,4.94 ; 7.671,6.312 8.001,6.312 ; 7.722,4.966 9.169,4.966 ; 7.722,6.286 8.001,6.286 ; 7.772,4.991 9.169,4.991 ; 7.772,6.261 8.001,6.261 ; 7.798,6.49 8.001,6.49 ; 7.798,6.515 8.001,6.515 ; 7.798,6.54 8.001,6.54 ; 7.798,6.566 8.788,6.566 ; 7.798,6.591 8.788,6.591 ; 7.798,6.617 8.788,6.617 ; 7.798,6.642 8.788,6.642 ; 7.798,6.667 8.788,6.667 ; 7.798,6.693 8.788,6.693 ; 7.798,6.718 8.788,6.718 ; 7.823,5.016 9.169,5.016 ; 7.849,6.236 8.001,6.236 ; 7.874,2.832 8.204,2.832 ; 7.874,2.857 8.204,2.857 ; 7.874,2.883 8.204,2.883 ; 7.874,2.908 8.204,2.908 ; 7.874,2.934 8.204,2.934 ; 7.874,2.959 8.204,2.959 ; 7.874,2.984 8.204,2.984 ; 7.874,3.01 8.204,3.01 ; 7.874,3.035 8.204,3.035 ; 7.874,3.061 8.204,3.061 ; 7.874,5.042 9.169,5.042 ; 7.874,6.21 8.001,6.21 ; 7.925,2.807 8.179,2.807 ; 7.925,5.067 9.169,5.067 ; 7.95,6.185 8.001,6.185 ; 7.976,5.093 9.169,5.093 ; 8.026,5.118 9.169,5.118 ; 8.077,5.143 9.169,5.143 ; 8.128,5.169 9.169,5.169 ; 8.179,5.194 9.169,5.194 ; 8.255,5.22 9.169,5.22 ; 8.28,5.245 9.169,5.245 ; 8.331,5.271 9.169,5.271 ; 8.382,5.296 9.169,5.296 ; 8.433,5.321 9.169,5.321 ; 8.484,5.347 9.169,5.347 ; 8.534,5.372 9.169,5.372 ; 8.585,5.397 9.169,5.397 ; 8.611,5.855 9.169,5.855 ; 8.611,5.88 9.169,5.88 ; 8.611,5.905 9.169,5.905 ; 8.611,5.931 9.169,5.931 ; 8.611,5.956 9.169,5.956 ; 8.611,5.982 9.144,5.982 ; 8.611,6.007 9.144,6.007 ; 8.611,6.032 9.119,6.032 ; 8.611,6.058 9.119,6.058 ; 8.611,6.083 9.093,6.083 ; 8.611,6.109 9.068,6.109 ; 8.611,6.134 9.042,6.134 ; 8.611,6.159 9.017,6.159 ; 8.611,6.185 8.966,6.185 ; 8.611,6.21 8.915,6.21 ; 8.611,6.236 8.788,6.236 ; 8.611,6.261 8.788,6.261 ; 8.611,6.286 8.788,6.286 ; 8.611,6.312 8.788,6.312 ; 8.611,6.337 8.788,6.337 ; 8.611,6.363 8.788,6.363 ; 8.611,6.388 8.788,6.388 ; 8.611,6.413 8.788,6.413 ; 8.611,6.439 8.788,6.439 ; 8.611,6.464 8.788,6.464 ; 8.611,6.49 8.788,6.49 ; 8.611,6.515 8.788,6.515 ; 8.611,6.54 8.788,6.54 ; 8.636,5.423 9.169,5.423 ; 8.661,5.829 9.169,5.829 ; 8.712,5.448 9.169,5.448 ; 8.712,5.804 9.169,5.804 ; 8.738,5.474 9.169,5.474 ; 8.763,5.779 9.169,5.779 ; 8.814,5.499 9.169,5.499 ; 8.814,5.753 9.169,5.753 ; 8.839,5.524 9.169,5.524 ; 8.865,5.728 9.169,5.728 ; 8.915,5.55 9.169,5.55 ; 8.915,5.702 9.169,5.702 ; 8.941,5.575 9.169,5.575 ; 8.941,5.601 9.169,5.601 ; 8.941,5.626 9.169,5.626 ; 8.941,5.651 9.169,5.651 ; 8.941,5.677 9.169,5.677 ; 9.271,3.518 9.525,3.518 ; 9.271,3.543 9.55,3.543 ; 9.271,3.569 9.55,3.569 ; 9.271,3.594 9.55,3.594 ; 9.271,3.619 9.576,3.619 ; 9.271,3.645 9.576,3.645 ; 9.271,3.67 9.576,3.67 ; 9.271,3.696 9.576,3.696 ; 9.271,3.721 9.576,3.721 ; 9.271,3.746 9.55,3.746 ; 9.271,3.772 9.55,3.772 ; 9.271,3.797 9.55,3.797 ; 9.271,3.823 9.525,3.823 ; 9.271,4.051 9.525,4.051 ; 9.271,4.077 9.55,4.077 ; 9.271,4.102 9.55,4.102 ; 9.271,4.127 9.55,4.127 ; 9.271,4.153 9.576,4.153 ; 9.271,4.178 9.576,4.178 ; 9.271,4.204 9.576,4.204 ; 9.271,4.229 9.576,4.229 ; 9.271,4.255 9.576,4.255 ; 9.271,4.28 9.55,4.28 ; 9.271,4.305 9.55,4.305 ; 9.271,4.331 9.55,4.331 ; 9.271,4.356 9.525,4.356 ; 9.271,4.585 9.5,4.585 ; 9.271,4.61 9.55,4.61 ; 9.271,4.635 9.55,4.635 ; 9.271,4.661 9.55,4.661 ; 9.271,4.686 9.55,4.686 ; 9.271,4.712 9.576,4.712 ; 9.271,4.737 9.576,4.737 ; 9.271,4.763 9.576,4.763 ; 9.271,4.788 9.576,4.788 ; 9.271,4.813 9.55,4.813 ; 9.271,4.839 9.55,4.839 ; 9.271,4.864 9.55,4.864 ; 9.271,4.889 9.55,4.889 ; 9.271,4.915 9.5,4.915 ; 9.271,5.143 9.525,5.143 ; 9.271,5.169 9.55,5.169 ; 9.271,5.194 9.55,5.194 ; 9.271,5.22 9.55,5.22 ; 9.271,5.245 9.576,5.245 ; 9.271,5.271 9.576,5.271 ; 9.271,5.296 9.576,5.296 ; 9.271,5.321 9.576,5.321 ; 9.271,5.347 9.576,5.347 ; 9.271,5.372 9.55,5.372 ; 9.271,5.397 9.55,5.397 ; 9.271,5.423 9.55,5.423 ; 9.271,5.448 9.525,5.448

## Polygon pours and split planes (outlines as drawn)
GND on Top "Bottom-No Net" (solid, pour order 4): 0,57.734 12.268,57.734 12.268,48.539 15.342,48.539 15.342,57.734 41.224,57.734 41.224,0 17.78,0 17.78,2.794 17.78,20.637 12.7,25.717 12.065,26.352 0,26.352
GND on Bottom "Bottom-No Net" (solid, pour order 6): 0,57.734 12.268,57.734 12.268,48.539 15.342,48.539 15.342,57.734 41.224,57.734 41.224,0 17.78,0 17.78,2.413 17.78,20.637 12.065,26.352 0,26.352

## Keep-outs
Keep-Out Layer:
  the board outline again, w0.254

## Other copper
Top:
  rectangle net 3V3: 29.972,19.812 31.178,20.892
  rectangle net NetC10_1: 27.94,41.656 29.464,42.672
  rectangle net GND: 23.304,46.355 24.003,47.053
  rectangle net GND: 24.003,46.672 25.146,47.053
  rectangle net GND: 24.003,41.465 26.289,43.878
  rectangle net GND: 24.003,43.878 26.924,46.672
  rectangle net 3V3: 31.242,17.716 32.448,18.224
  rectangle net 3V3: 30.861,18.224 32.448,20.383
  rectangle net 3V3: 29.718,39.243 30.607,40.132
  rectangle net 3V3: 29.718,40.132 32.893,41.212
  rectangle net GND: 35.814,51.689 38.036,53.848
  rectangle net GND: 34.099,48.197 35.687,48.578
  rectangle net GND: 34.099,48.578 37.782,52.197
  rectangle net NetL3_1: 35.941,44.704 37.719,48.323
  rectangle net 3V3: 38.291,51.435 39.179,52.197
  rectangle net 3V3: 38.036,43.116 40.195,51.435
  rectangle net NetL3_1: 33.846,44.958 36.131,47.942
  rectangle net D7/PW_EN: 35.179,41.465 35.75,42.545
  rectangle net D7/PW_EN: 33.591,41.465 33.846,42.418
  rectangle net D7/PW_EN: 33.846,41.465 35.179,43.688
  rectangle net NetC10_1: 32.194,41.465 32.956,42.735
  rectangle net NetC21_1: 32.004,42.989 32.448,43.624
  rectangle net NetC10_1: 32.703,42.672 33.591,43.878
  rectangle net NetC21_1: 29.718,41.656 30.48,42.418
  rectangle net NetC21_1: 30.353,41.656 32.004,43.624
  rectangle net NetC10_1: 30.035,43.878 33.591,47.942
  rectangle net VUSB: 25.4,46.926 27.432,47.561
  rectangle net NetC10_1: 27.686,44.259 27.94,47.307
  rectangle net NetC10_1: 27.94,42.672 30.099,48.704
  rectangle net VUSB: 25.4,47.561 27.622,49.149
  rectangle net V_BATT: 20.955,47.307 25.146,50.863
  rectangle net NetC10_1: 27.94,48.323 30.099,49.403
  rectangle net NetC10_1: 25.4,49.403 30.099,50.863
  rectangle net VUSB: 30.607,48.387 33.846,51.117
  rectangle net NetC18_2: 40.069,51.625 40.957,53.721
  rectangle net NetC17_1: 38.735,34.163 41.084,42.862
  rectangle net NetF1_1: 39.37,53.975 41.021,57.594
  rectangle net NetF1_1: 38.608,52.705 39.37,57.594
  rectangle net VUSB: 33.21,52.451 33.528,53.467
  rectangle net VUSB: 33.528,52.451 35.56,57.594
  rectangle net VUSB: 30.607,51.117 33.846,53.467
  rectangle net GND: 31.941,53.911 33.21,54.991
  rectangle net NetR8_2: 30.607,55.245 33.21,55.753
  rectangle net NetD4_2: 30.797,56.515 31.305,57.213
  rectangle net NetD4_1: 28.258,55.308 28.892,56.261
  rectangle net GND: 29.273,53.721 33.21,54.356
  rectangle net GND: 29.21,55.562 29.845,57.468
  rectangle net GND: 29.591,52.197 30.353,55.753
  rectangle net GND: 25.082,51.117 30.353,52.261
  rectangle net GND: 19.494,51.117 25.082,52.514
  rectangle net V_BATT: 25.654,52.514 29.337,53.467
  rectangle net GND: 28.003,53.721 28.258,54.356
  rectangle net GND: 26.098,53.721 28.003,55.944
  rectangle net GND: 19.494,55.944 27.877,57.594
  rectangle net V_BATT: 19.494,52.768 25.845,55.689
  rectangle net GND: 10.858,29.074 13.767,30.099
  rectangle net 3V3: 16.319,10.731 17.843,13.144
  rectangle net 3V3: 21.526,12.065 22.415,14.16
  rectangle net 3V3: 5.271,22.924 7.62,24.575
  rectangle net GND: 24.003,41.021 25.4,41.465
  rectangle net 3V3MCU: 10.795,42.481 14.351,45.085
  rectangle net 3V3MCU: 14.16,42.481 14.668,44.005
  rectangle net GND: 10.414,45.34 14.351,47.307
  rectangle net GND: 33.846,43.942 35.623,44.704
  rectangle net GND: 36.781,42.862 37.782,44.449
  text "2015" at 3.442,2.578 h1
  text "Battery Oprated Board V1.1" at 3.391,1.613 h0.7
  text "Designed by Souliss and KMP Electronics" at 0.445,0.572 h0.7
Bottom:
  rectangle net VUSB: 30.607,50.609 33.846,51.117
  rectangle net VUSB: 25.4,47.561 33.846,50.863
  rectangle net GND: 15.557,47.307 19.241,55.944
  rectangle net GND: 15.557,55.944 19.494,57.594
  rectangle net V_BATT: 19.494,47.307 25.146,51.181
  rectangle net VUSB: 33.21,52.451 33.846,53.467
  rectangle net VUSB: 30.607,51.117 33.846,53.467
  rectangle net GND: 26.098,51.117 28.194,52.261
  rectangle net GND: 28.194,51.117 30.353,53.721
  rectangle net GND: 26.098,53.721 33.401,55.944
  rectangle net GND: 19.494,55.944 33.401,57.594
  rectangle net V_BATT: 25.781,52.514 27.94,53.467
  rectangle net V_BATT: 19.494,51.117 25.845,55.689
  rectangle net 3V3MCU: 10.795,42.481 16.066,45.085
  rectangle net NetC10_1: 25.4,41.719 33.846,47.307

## Silkscreen, mask and mechanical layers (free items; w line width, h text height)
Top Overlay:
  lines w0.254: 24.816,18.161 29.87,18.161 ; 0.696,8.001 29.896,8.001 29.896,23.001 0.696,23.001 0.696,8.001
  text "BAT" at 25.4,56.388 h0.86
  text "RX" at 9.728,54.661 h0.86
  text "TX" at 6.782,54.635 h0.86
  text "RESET" at 0.432,49.428 h0.86
Dimension:
  lines w0.254: -2.031,56.185 -1.524,57.709 ; -2.007,3.48 -1.499,1.956 ; -1.778,57.709 -1.27,57.709 ; -1.753,1.956 -1.245,1.956 ; -1.515,37.856 -1.524,57.709 ; -1.508,21.808 -1.499,1.956 ; -1.015,56.185 -1.524,57.709 ; -0.991,3.48 -1.499,1.956 ; -0.05,-1.524 -0.051,-1.016 ; 1.472,-0.76 -0.051,-1.27 ; 1.474,-1.776 -0.051,-1.27 ; 12.772,-1.25 -0.051,-1.27 ; 28.312,-1.226 41.136,-1.206 ; 39.611,-0.7 41.136,-1.206 ; 39.613,-1.716 41.136,-1.206 ; 41.135,-0.952 41.136,-1.46
  text "55.753 (mm)" at -2.429,37.602 h1.52 r270.03
  text "41.187 (mm)" at 13.028,-2.164 h1.52 r0.09
tDocu:
  text "Mike Hord" at -59.379,37.04 h1.51
  text "Revised by: Kade Jensen" at -79.699,34.5 h1.51

## Text inside footprints (layer, text, board x,y; h text height)
A: tNames ">NAME" at 40.208,27.518 h0.69 r270; tValues ">VALUE" at 37.795,27.788 h0.69 r270; tFinish ">name" at 37.846,27.735 h0.69 r270
D: tNames ">NAME" at 40.208,12.455 h0.69 r270; tValues ">VALUE" at 37.795,12.725 h0.69 r270; tFinish ">name" at 37.846,12.672 h0.69 r270
I2C: tNames ">NAME" at 26.654,0.533 h0.69 r180; tValues ">VALUE" at 26.924,2.946 h0.69 r180; tFinish ">name" at 26.871,2.896 h0.69 r180
JP1: tDocu "+" at 23.52,55.143 h1.97 r90; tDocu "-" at 23.52,50.063 h1.97 r90